# Altium PCB AIMLAB_TESTSTATION_ADC_V1.PcbDoc (part 3 of 4)
Units mm, origin at the board's own origin, x right, y up, seen from the top; angles counter-clockwise.
Board outline 175.7 x 83.5 mm, 6 copper layers (Top Layer, MidLayer1, MidLayer2, MidLayer3, MidLayer4, Bottom Layer), stack 1.507 mm thick; 326 components, 348 nets, 1330 pads, 153 vias.
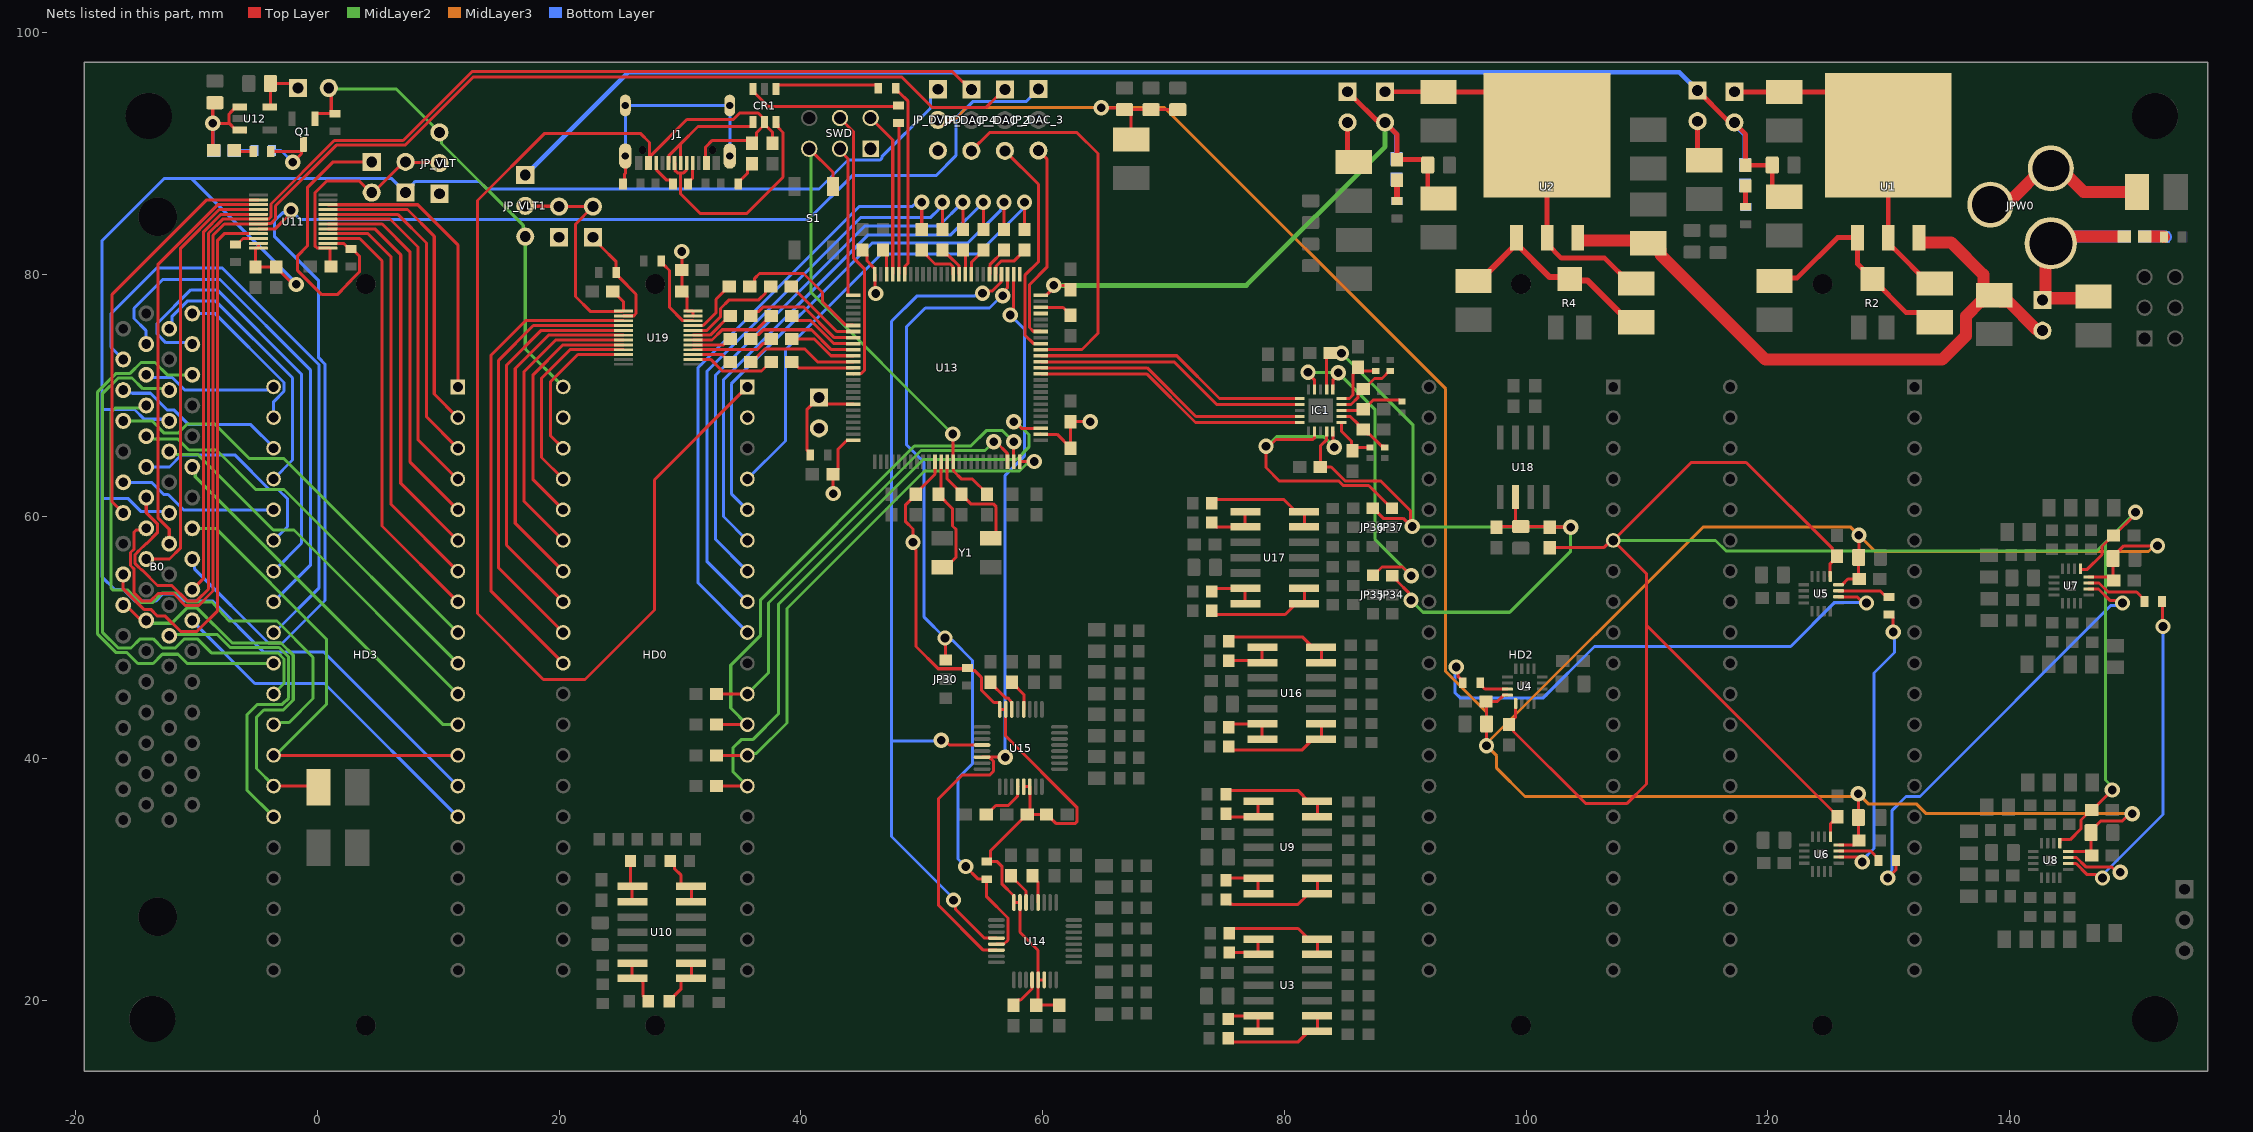
[diagram p7: the nets of this part, all layers, seen from the top]

## Via types
v1: diameter 1.27, hole 0.711, Top Layer to Bottom Layer, 153 vias

## Nets (pads, with @x,y where several pads share a name; then routed paths per layer and width w, separated by ;. In a path a pad name is that pad's centre, name@x,y a point inside that pad or via, vN(x,y) a via of type N, cw(c..) or ccw(c..) an arc to the next point about the centre after c; other vN are vias at no path point) (continued)
DAQ_AO0: B0.22 HD3.30 | length 27.5
  MidLayer2 w0.254: B0.22@-12.247,50.135 -12.124,50.258 -8.297,50.258 -7.199,49.16 -3.156,49.16 -2.374,48.379 -2.374,44.976 -2.889,44.461 -4.954,44.461 -5.825,43.59 -5.825,37.375 HD3.30@-3.615,35.165
DAQ_AO1: B0.21 HD3.29 | length 28.7
  Bottom Layer w0.254: B0.21@-10.342,51.405 -10.342,51.367 -5.164,46.189 0.601,46.189 HD3.29@11.625,35.165
DAQ_AOGND0: B0.54 B0.55 HD3.28 L5.2 | length 34.2
  Top Layer w0.254: B0.54@-16.057,52.675 -15.85,52.675 -14.784,51.609 -14.356,51.609 B0.55@-14.152,51.405 ; HD3.28@-3.615,37.705 -0.005,37.705 L5.2@0.1,37.6
  MidLayer2 w0.254: B0.55@-14.152,51.405 -13.922,51.175 -12.05,51.175 -10.804,52.421 -9.921,52.421 -7.042,49.541 -2.998,49.541 -1.993,48.537 -1.993,45.186 -1.993,44.818 -2.811,44 -4.425,44 -5.025,43.4 -5.025,39.15 -3.615,37.74 HD3.28@-3.615,37.705
DAQ_DGND0: B0.15 HD3.25 HD3.26 | length 41.7
  Top Layer w0.25: HD3.26@-3.615,40.245 HD3.25@11.625,40.245
  MidLayer2 w0.25: B0.15@-10.342,59.025 -8.4,59.025 0.75,49.875 0.75,44.45 -3.455,40.245 HD3.26@-3.615,40.245
DAQ_DIO0: B0.52 U11.21 | length 45.4
  Top Layer w0.254: B0.52@-16.057,55.215 -16.057,54.024 -14.353,52.319 -13.773,52.319 -13.214,51.761 -12.579,51.761 -11.309,50.491 -9.963,50.491 -8.242,52.212 -8.242,82.858 -7.7,83.4 U11.21@-4.87,83.4
DAQ_DIO0T: HD3.15 U11.3 | length 36.1
  Top Layer w0.25: U11.3@0.87,83 3.5,83 5.35,81.15 5.35,59.22 HD3.15@11.625,52.945
DAQ_DIO1: B0.17 JP_DAC_3.1 U11.20 | length 122.4
  Top Layer w0.254: U11.20@-4.87,83.8 -3.482,83.8 -2.175,85.107 v1(-2.175,85.325)
  Bottom Layer w0.254: B0.17@-10.342,56.485 -10.147,56.29 -10.147,55.647 -4.041,49.541 -2.884,49.541 0.632,53.057 0.632,72.604 0.111,73.125 0.111,79.514 -3.55,83.175 -3.55,84.45 -2.869,85.131 -2.369,85.131 v1(-2.175,85.325) -1.436,84.586 40.636,84.586 44.25,88.2 51.175,88.2 52.825,89.85 52.825,92.935 54.215,94.325 58.62,94.325 JP_DAC_3.1@59.65,95.355
DAQ_DIO1T: HD3.13 U11.4 | length 34.3
  Top Layer w0.254: U11.4@0.87,83.4 4.2,83.4 6.1,81.5 6.1,61.01 HD3.13@11.625,55.485
DAQ_DIO2: B0.49 JP_DAC_2.1 U11.19 | length 117
  Top Layer w0.25: B0.49@-14.152,59.025 -14.29,58.887 -14.979,58.887 -15.145,58.721 -15.145,57.322 -15.445,57.021 -15.445,55.949 -15.145,55.648 -15.145,53.647 -14.53,53.033 -13.774,53.033 -13.182,53.625 -11.9,53.625 -10.9,52.625 -9.833,52.625 -8.621,53.837 -8.621,83.266 -7.687,84.2 U11.19@-4.87,84.2 -4.865,84.205 -4.147,84.205 -4.124,84.228 -3.859,84.228 -3.452,84.635 -3.452,85.698 1.571,90.721 7.257,90.721 12.911,96.375 48.325,96.375 50.85,93.85 55.325,93.85 56.18,94.705 56.25,94.705 JP_DAC_2.1@56.875,95.33
DAQ_DIO2T: HD3.11 U11.5 | length 32.5
  Top Layer w0.254: U11.5@0.87,83.8 4.75,83.8 6.9,81.65 6.9,62.75 HD3.11@11.625,58.025
DAQ_DIO3: B0.47 JP_DAC_4.1 U11.18 | length 113.7
  Top Layer w0.254: B0.47@-14.152,61.565 -14.152,60.318 -13.238,59.404 -13.238,58.646 -14.129,57.755 -14.175,57.755 -14.746,57.184 -14.766,57.165 -15.066,56.864 -15.066,56.106 -14.766,55.805 -14.746,55.786 -14.531,55.571 -14.484,55.571 -13.214,54.301 -12.04,54.301 -10.77,53.031 -9.963,53.031 -9,53.994 -9,83.423 -7.823,84.6 U11.18@-4.87,84.6 -4.863,84.607 -4.145,84.607 -4.126,84.626 -3.997,84.626 -3.831,84.792 -3.831,85.855 1.414,91.1 7.1,91.1 12.819,96.819 52.531,96.819 53.397,95.953 53.477,95.953 JP_DAC_4.1@54.1,95.33
DAQ_DIO3T: HD3.9 U11.6 | length 30.7
  Top Layer w0.254: U11.6@0.87,84.2 5.361,84.2 7.65,81.911 7.65,64.54 HD3.9@11.625,60.565
DAQ_DIO4: B0.19 U11.17 | length 35.1
  Top Layer w0.254: B0.19@-10.342,53.945 -9.4,54.887 -9.4,83.562 -7.962,85 U11.17@-4.87,85
DAQ_DIO4T: HD3.7 U11.7 | length 28.4
  Top Layer w0.254: U11.7@1.5,84.619 6.006,84.619 8.325,82.3 8.325,66.35 11.57,63.105 HD3.7@11.625,63.105
DAQ_DIO5: B0.51 U11.16 | length 35.8
  Top Layer w0.254: B0.51@-14.152,56.485 -12.224,56.485 -11.3,57.409 -11.3,82.201 -8.108,85.393 -4.877,85.393 U11.16@-4.87,85.4
DAQ_DIO5T: HD3.5 U11.8 | length 27.2
  Top Layer w0.254: U11.8@0.87,85 6.65,85 9.025,82.625 9.025,68.245 HD3.5@11.625,65.645
DAQ_DIO6: B0.16 U11.15 | length 33.8
  Top Layer w0.254: B0.16@-12.247,57.755 -12.247,58.952 -13.161,59.866 -13.161,80.878 -8.24,85.8 U11.15@-4.87,85.8
DAQ_DIO6T: HD3.3 U11.9 | length 25.5
  Top Layer w0.254: U11.9@0.87,85.4 0.877,85.393 7.457,85.393 9.675,83.175 9.675,70.135 HD3.3@11.625,68.185
DAQ_DIO7: B0.48 U11.14 | length 33.8
  Top Layer w0.254: B0.48@-16.057,60.295 -16.971,61.209 -16.971,78.379 -9.15,86.2 U11.14@-4.87,86.2
DAQ_DIO7T: HD3.1 U11.10 | length 23.9
  Top Layer w0.254: U11.10@0.87,85.8 0.877,85.793 8.307,85.793 11.625,82.475 HD3.1@11.625,70.725
DAQ_DVDD5: B0.8 B0.14 C50.2 C51.2 HD3.27 JP4.1 JP_DVDD.1 U11.23 U11.24 | length 172
  Top Layer w0.254: U11.23@-4.87,82.6 U11.24@-4.87,82.2 -5.093,82.2 -5.1,82.193 C51.2@-5.1,80.65 C50.2@-3.4,80.65 -3.4,80.6 -2,79.2 v1(-1.75,79.2)
  Bottom Layer w0.254: B0.14@-12.247,60.295 -12.352,60.4 -14.575,60.4 -15.683,61.508 -17.825,61.508 ; B0.8@-12.247,67.915 -12.382,68.05 -14.31,68.05 -15.12,68.859 -17.825,68.859 ; v1(-1.75,79.2) -1.75,79.305 -10.423,87.978 ; HD3.27@11.625,37.705 0.551,48.779 -4.422,48.779 -8.673,53.031 -11.015,53.031 -11.574,53.589 -12.773,53.589 -13.332,53.031 -15.119,53.031 -16.064,53.975 -16.775,53.975 -17.825,55.025 -17.825,61.508 ; JP_DVDD.1@51.333,95.347 50.71,94.724 50.71,93.76 46.704,89.754 46.704,89.645 46.555,89.496 43.896,89.496 41.5,87.1 14.02,87.1 13.416,87.704 8.072,87.704 7.923,87.555 7.923,87.423 JP4.1@7.3,86.8 6.122,87.978 -10.423,87.978 ; -17.825,61.508 -17.825,68.859 ; -17.825,68.859 -17.825,82.797 -12.644,87.978 -10.423,87.978
DAQ_PFI0: B0.11 HD3.23 | length 31.1
  MidLayer2 w0.25: B0.11@-10.342,64.105 -10.098,63.861 -10.098,63.29 10.406,42.785 HD3.23@11.625,42.785
DAQ_PFI1: B0.10 HD3.21 | length 32.2
  MidLayer2 w0.25: B0.10@-12.247,65.375 -11.902,65.375 -11.646,65.119 -9.869,65.119 -3.637,58.887 -1.937,58.887 HD3.21@11.625,45.325
DAQ_PFI2: B0.43 HD3.19 | length 33.6
  MidLayer2 w0.25: B0.43@-14.152,66.645 -13.908,66.401 -13.37,66.401 -13.369,66.4 -11.531,66.4 -10.627,65.496 -8.346,65.496 -5.093,62.243 -2.753,62.243 HD3.19@11.625,47.865
DAQ_PFI3: B0.42 HD3.17 | length 35.6
  MidLayer2 w0.25: B0.42@-16.057,67.915 -13.681,67.915 -12.667,66.901 -11.52,66.901 -10.762,67.659 -8.48,67.659 -5.605,64.783 -2.753,64.783 HD3.17@11.625,50.405
DAQ_PFI4: B0.41 HD3.24 | length 45.1
  MidLayer2 w0.25: B0.41@-14.152,69.185 -14.362,68.975 -16.725,68.975 -17.071,68.629 -17.071,54.175 -17.071,54.071 -16.925,53.925 -15.675,53.925 -14.621,52.871 -13.633,52.871 -12.815,53.689 -11.52,53.689 -10.762,52.931 -8.718,52.931 -8.552,52.765 -7.307,51.35 -3.342,51.35 -0.35,48.358 -0.35,44.95 -2.33,42.97 -3.43,42.97 HD3.24@-3.615,42.785
DAQ_PFI5: B0.6 HD3.22 | length 46.7
  MidLayer2 w0.25: B0.6@-12.247,70.455 -12.368,70.576 -14.437,70.576 -15.33,71.469 -16.477,71.469 -17.75,70.196 -17.75,50.394 -16.477,49.121 -15.407,49.121 -14.649,49.879 -13.579,49.879 -12.821,49.121 -11.75,49.121 -10.992,49.879 -9.922,49.879 -8.766,48.723 -3.975,48.723 -3.972,48.727 -3.258,48.727 -2.753,48.222 -2.753,46.187 HD3.22@-3.615,45.325
DAQ_PFI6: B0.5 HD3.20 | length 45.5
  MidLayer2 w0.25: B0.5@-10.342,71.725 -12.411,71.725 -13.425,72.739 -14.583,72.739 -15.476,71.846 -16.633,71.846 -18.2,70.279 -18.2,50.311 -16.633,48.744 -15.744,48.744 -14.851,47.851 -13.579,47.851 -12.821,48.609 -11.52,48.609 -10.762,47.851 -3.629,47.851 HD3.20@-3.615,47.865
DAQ_PFI7: B0.38 HD3.18 | length 50
  Bottom Layer w0.25: B0.38@-16.057,72.995 -17.071,74.009 -17.071,76.779 -13.3,80.55 -7.85,80.55 0.125,72.575 0.125,54.075 -3.545,50.405 HD3.18@-3.615,50.405
DAQ_PFI8: B0.37 HD3.16 | length 42.5
  Bottom Layer w0.25: B0.37@-14.152,74.265 -14.183,74.296 -14.183,75.402 -15.166,76.385 -15.166,77.225 -12.791,79.6 -8.05,79.6 -0.55,72.1 -0.55,56.01 HD3.16@-3.615,52.945
DAQ_PFI9: B0.3 HD3.14 | length 37.4
  Bottom Layer w0.25: B0.3@-10.342,74.265 -10.463,74.386 -12.532,74.386 -13.261,75.115 -13.261,75.955 -10.466,78.75 -8.275,78.75 -1.3,71.775 -1.3,57.8 HD3.14@-3.615,55.485
DAQ_PFI10: B0.45 HD3.12 | length 17.5
  Bottom Layer w0.25: B0.45@-14.152,64.105 -12.227,64.105 -11.232,65.1 -6.829,65.1 -3.972,62.243 -3.243,62.243 -2.475,61.475 -2.475,59.165 HD3.12@-3.615,58.025
DAQ_PFI11: B0.46 HD3.10 | length 13.4
  Bottom Layer w0.25: B0.46@-16.057,62.835 -13.718,62.835 -12.704,61.821 -12.339,61.821 -11.069,60.551 -3.629,60.551 HD3.10@-3.615,60.565
DAQ_PFI12: B0.2 HD3.8 | length 23.3
  Bottom Layer w0.25: B0.2@-12.247,75.535 -12.003,75.779 -12.003,76.578 -10.762,77.819 -8.394,77.819 -2.05,71.475 -2.05,64.67 HD3.8@-3.615,63.105
DAQ_PFI13: B0.40 HD3.6 | length 14.5
  Bottom Layer w0.25: B0.40@-16.057,70.455 -15.813,70.211 -15.286,70.211 -15.274,70.199 -13.799,70.199 -12.427,68.827 -11.869,68.827 -10.642,67.6 -5.5,67.6 -3.615,65.715 HD3.6@-3.615,65.645
DAQ_PFI14: B0.1 HD3.4 | length 13.2
  Bottom Layer w0.25: B0.1@-10.342,76.805 -8.477,76.805 -2.753,71.082 -2.753,70.368 -3.615,69.506 HD3.4@-3.615,68.185
DAQ_PFI15: B0.39 HD3.2 | length 11.2
  Bottom Layer w0.25: B0.39@-14.152,71.725 -13.927,71.5 -12,71.5 -10.95,70.45 -4.152,70.45 -3.877,70.725 HD3.2@-3.615,70.725
DVDD: C11.1 C12.1 C13.1 C14.1 C24.2 C25.2 C28.2 C29.2 C36.2 C37.2 C40.2 C41.2 C46.2 C47.2 HD0.3 JP_DVDD.2 U4.16 U5.16 U6.16 U7.16 U8.16 | length 245.5
  Top Layer w0.25: v1(64.85,93.825) 64.875,93.8 66.63,93.8 C12.1@66.775,93.655 ; C11.1@67.325,91.2 67.325,93.241 66.911,93.655 C13.1@68.975,93.655 C14.1@71.175,93.655 ; C25.2@96.675,44.7 97.615,44.7 98.14,45.225 U4.16@98.45,45.225 ; v1@96.72,40.97 C24.2@96.72,42.925 ; C24.2@96.72,43.079 C25.2@96.72,44.7 ; U5.16@125.835,54.36 126.145,54.36 126.61,54.825 C29.2@127.55,54.825 127.505,54.87 C28.2@127.505,56.625 127.525,56.645 v1(127.525,58.45) ; U6.16@125.87,32.825 127.15,32.825 C37.2@127.525,33.2 127.48,33.245 C36.2@127.48,35.1 v1(127.48,37.055) ; U8.16@144.825,32.3 146.425,32.3 C47.2@146.775,31.95 146.73,31.995 C46.2@146.73,33.85 146.73,34.02 147.522,34.812 149.31,34.812 149.923,35.425 v1(150.125,35.425) ; U7.16@146.535,55.01 148.29,55.01 C41.2@148.6,54.7 148.555,54.745 148.555,56.695 149.435,57.575 v1(152.225,57.575)
  MidLayer3 w0.25: JP_DVDD.2@51.333,92.807 52.7,92.807 53.71,93.817 70.086,93.817 93.338,70.565 93.338,47.183 96.72,43.801 v1@96.72,41.22 ; v1(150.125,35.425) 133.083,35.425 132.268,36.24 128.295,36.24 v1(127.48,37.055) 127.204,37.055 126.992,36.843 99.902,36.843 97.561,39.184 97.561,40.204 v1(96.72,41.045) v1@96.72,41.22 ; v1(152.225,57.575) 151.949,57.575 151.474,57.1 128.875,57.1 v1(127.525,58.45) 126.85,59.125 114.625,59.125 v1@96.72,41.22
DVDD1.8: HD0.2 JP5.2 JP_VLT1.3 JP_VLT.3 Q1.1 R10.2 | length 40.4
  Top Layer w0.254: Q1.1@-0.2,92.91 -0.2,93.152 -0.027,93.325 R10.2@1.475,93.325 1.35,93.325 1.152,93.523 1.152,95.248 JP5.2@0.95,95.45
  MidLayer2 w0.254: JP5.2@0.95,95.45 1.025,95.375 6.505,95.375 JP_VLT.3@10.1,91.78 10.268,91.612 10.268,90.857 17.037,84.088 17.037,83.323 JP_VLT1.3@17.2,83.16 17.2,73.86 HD0.2@20.335,70.725
DVDD_3V: C9.1 C10.2 C32.2 C33.2 C42.2 C43.2 C53.2 C93.2 C96.2 C97.2 C98.2 C99.2 C100.2 C117.2 C118.2 HD0.4 JP2.2 JP19.1 JP28.2 JP32.1 JP_DVDD.3 JP_VLT.1 LED3.2 LED4.2 LED8.2 LED9.2 R27.2 R28.2 SWD.1 U12.1 U12.3 U13.11 U13.27 U13.50 U13.75 U13.100 U14.15 U14.16 U14.29 U14.30 U15.15 U15.16 U15.29 U15.30 U19.23 U19.24 | length 156.7
  Top Layer w0.25: v1(-8.65,92.525) -8.65,90.375 LED4.2@-8.575,90.3 ; -7.287,92.761 -7.287,92.522 -6.74,91.975 U12.3@-6.43,91.975 ; -7.128,93.487 U12.1@-6.74,93.875 ; C100.2@42.65,63.5 42.675,63.475 v1(42.675,61.9) ; C100.2@42.7,63.5 43.075,63.875 43.075,65.575 43.773,66.273 44.323,66.273 U13.100@44.35,66.3 ; C96.2@49.5,61.85 49.5,61.8 48.675,60.975 48.675,59.569 49.275,58.969 v1(49.275,57.875) 49.47,57.68 49.47,57.273 49.525,57.219 49.525,49.244 51.361,47.408 53.708,47.408 R28.2@53.775,47.475 ; C96.2@49.5,61.9 51.1,63.5 U13.11@51.1,64.55 ; R28.2@53.875,47.475 54.075,47.275 54.35,47.275 54.923,46.702 54.923,45.646 55.959,44.61 56.419,44.61 56.442,44.586 U15.16@56.442,44.05 U15.15@56.942,44.05 56.942,41.84 62.827,35.954 62.827,34.746 62.679,34.598 61.127,34.598 60.375,35.35 C43.2@60.325,35.35 C42.2@58.725,35.35 ; R27.2@55.375,31.45 R27.2@55.5,31.45 ; U15.29@58.442,37.65 U15.30@58.942,37.65 58.942,35.567 C42.2@58.725,35.35 ; U13.27@59.823,66.827 U13.27@59.85,66.8 61.2,66.8 C93.2@62.3,65.7 ; U13.50@59.85,78.3 60.294,78.3 60.925,78.931 v1(60.925,79.125) 61.925,79.125 C99.2@62.3,78.75 ; U14.30@60.125,21.675 U14.29@59.625,21.675 ; C33.2@61.375,19.575 C32.2@59.475,19.575 59.625,19.725 U14.29@59.625,21.675 ; C93.2@62.3,65.65 C98.2@62.3,67.85 v1(63.925,67.85) ; R27.2@55.5,31.45 55.7,31.65 55.7,32.375 58.675,35.35 C42.2@58.725,35.35 ; R27.2@55.5,31.45 56.25,31.45 56.623,31.077 56.623,29.621 57.625,28.619 U14.16@57.625,28.075 U14.15@58.125,28.075 58.125,25.62 59.625,24.12 U14.29@59.625,21.675
  Top Layer w0.254: C53.2@-8.475,94.23 -8.65,94.055 v1(-8.65,92.525) -7.287,92.525 ; -7.289,92.761 -7.289,93.299 -7.114,93.474 -7.114,93.501 -6.74,93.875 U12.1@-6.43,93.875 ; U12.3@-6.43,91.975 -6.12,91.975 U12.3@-5.952,91.807 ; v1(30.15,81.925) C118.2@30.15,80.4 C117.2@30.15,78.6 30.2,78.6 30.573,78.227 30.573,77.007 30.58,77 U19.24@31.07,77 31.07,76.607 31.077,76.6 31.1,76.6 U19.23@31.07,76.6 ; C97.2@45.1,82.05 45.473,81.677 45.473,81.152 46.075,80.55 46.075,80.075 46.125,80.025 46.125,78.525 v1(46.2,78.45)
  Top Layer w0.4: JP19.1@85.244,95.14 85.244,95.121 85.775,94.59 85.794,94.59 87.574,92.81 88.115,92.81 89.3,91.625 LED3.2@89.3,89.525 91.515,89.525 91.855,89.185 C10.2@91.855,89.075 91.855,87.1 92.655,86.3 C9.1@92.75,86.3
  MidLayer2 w0.4: v1(60.925,79.125) 76.85,79.125 88.325,90.6 JP2.2@88.325,92.6
  Bottom Layer w0.25: v1(-8.65,92.525) -8.65,90.3 LED9.2@-8.575,90.225
  Bottom Layer w0.4: JP2.2@88.325,92.6 88.325,92.591 89.275,91.641 LED8.2@89.275,89.6
DVDD_5V: C7.1 C8.1 JP1.2 JP31.1 JP_VLT1.1 LED2.2 LED7.2 | length 118.4
  Top Layer w0.4: JP31.1@114.175,95.24 116.605,92.81 117.015,92.81 JP1.2@117.225,92.6 117.225,92.541 118.15,91.616 LED2.2@118.15,89.05 118.162,89.062 120.342,89.062 C8.1@120.355,89.075 120.355,87.25 121.155,86.45 C7.1@121.35,86.45
  Bottom Layer w0.4: JP_VLT1.1@17.2,88.24 25.706,96.746 112.669,96.746 JP31.1@114.175,95.24 ; JP1.2@117.225,92.6 117.225,92.441 118.1,91.566 LED7.2@118.1,89.1
MCU_ADC1: HD0.21 R92.1 U13.23 | length 37.1
  Top Layer w0.25: R92.1@33.025,45.325 HD0.21@35.575,45.325 ; v1@55.95,66.125 56.175,66.125 57.073,65.227 57.073,64.577 U13.23@57.1,64.55
  MidLayer2 w0.25: HD0.21@35.575,45.325 37.325,47.075 37.325,52.85 49.929,65.454 55.229,65.454 v1(55.95,66.175)
MCU_ADC2: HD0.23 R93.1 U13.24 | length 43.2
  Top Layer w0.25: R93.1@33.025,42.785 HD0.23@35.575,42.785 ; U13.24@57.6,64.55 v1(57.6,66.175)
  MidLayer2 w0.25: HD0.23@35.575,42.785 34.2,44.16 34.2,47.708 36.675,50.183 36.675,53.125 49.381,65.831 54.056,65.831 55.325,67.1 56.675,67.1 v1(57.6,66.175)
MCU_ADC3: HD0.25 R94.1 U13.25 | length 43.1
  Top Layer w0.25: R94.1@33.025,40.245 HD0.25@35.575,40.245 ; U13.25@58.1,64.55 v1(59.3,64.55)
  MidLayer2 w0.25: HD0.25@35.575,40.245 35.724,40.394 36.319,40.394 38.85,42.925 38.85,52.4 50.225,63.775 58.094,63.775 58.673,64.355 59.105,64.355 v1(59.3,64.55)
MCU_ADC4: HD0.27 R95.1 U13.28 | length 51.5
  Top Layer w0.25: R95.1@33.025,37.705 HD0.27@35.575,37.705 ; v1(57.6,67.85) 57.706,67.85 58.256,67.3 U13.28@59.85,67.3
  MidLayer2 w0.25: HD0.27@35.575,37.705 34.375,38.905 34.375,40.85 35.1,41.575 36.05,41.575 38.15,43.675 38.15,52.75 50.125,64.725 57.85,64.725 58.859,65.734 58.859,66.791 57.8,67.85 v1(57.6,67.85)
MCU_DAC_CLRn: U13.47
MCU_DAC_CSn: JP_DAC_4.3 U13.41 | length 32
  Top Layer w0.254: JP_DAC_4.3@54.1,90.25 55.625,91.775 62.825,91.775 64.575,90.025 64.575,75.15 63.25,73.825 59.875,73.825 U13.41@59.85,73.8
MCU_DAC_SCK: JP_DAC_2.3 U13.42 | length 18.5
  Top Layer w0.254: JP_DAC_2.3@56.875,90.25 59.65,87.475 59.65,81.075 58.525,79.95 58.525,75.016 59.216,74.325 59.825,74.325 U13.42@59.85,74.3
MCU_DAC_SDI: JP_DAC_3.3 U13.44 | length 16.6
  Top Layer w0.254: JP_DAC_3.3@59.65,90.275 60.375,89.55 60.375,80.65 58.906,79.181 58.906,75.635 59.216,75.325 59.825,75.325 U13.44@59.85,75.3
MCU_DIO0: R70.1 U19.21 | length 5
  Top Layer w0.25: U19.21@31.07,75.8 31.075,75.805 31.919,75.805 32.971,76.857 32.971,77.971 34.025,79.025 R70.1@34.075,79.025
MCU_DIO0t: HD0.20 U19.3 | length 40.1
  Top Layer w0.254: HD0.20@20.335,47.865 14.35,53.85 14.35,73.325 17.225,76.2 U19.3@25.33,76.2
MCU_DIO1: R71.1 U19.20 | length 8.4
  Top Layer w0.25: U19.20@31.07,75.4 32.23,75.4 33.348,76.518 33.348,77.204 34.071,77.927 36.527,77.927 37.075,78.475 37.075,78.65 37.45,79.025 R71.1@37.5,79.025
MCU_DIO1t: HD0.18 U19.4 | length 36.3
  Top Layer w0.254: HD0.18@20.335,50.405 15,55.74 15,72.925 17.875,75.8 U19.4@25.33,75.8
MCU_DIO2: R72.1 U19.19 | length 3.7
  Top Layer w0.25: U19.19@31.07,75 32.5,75 34.1,76.6 R72.1@34.15,76.6
MCU_DIO2t: HD0.16 U19.5 | length 32.4
  Top Layer w0.254: HD0.16@20.335,52.945 15.65,57.63 15.65,72.525 18.525,75.4 U19.5@25.33,75.4
MCU_DIO3: R73.1 U19.18 | length 7.3
  Top Layer w0.25: U19.18@31.07,74.6 32.644,74.6 33.496,75.452 36.352,75.452 37.5,76.6 R73.1@37.55,76.6
MCU_DIO3t: HD0.14 U19.6 | length 28.5
  Top Layer w0.254: HD0.14@20.335,55.485 16.375,59.445 16.375,72.25 19.125,75 U19.6@25.33,75
MCU_DIO4: R74.1 U19.17 | length 3.3
  Top Layer w0.25: U19.17@31.07,74.2 33.6,74.2 34.1,74.7 R74.1@34.15,74.7
MCU_DIO4t: HD0.12 U19.7 | length 24.6
  Top Layer w0.254: HD0.12@20.335,58.025 17.1,61.26 17.1,71.975 19.725,74.6 U19.7@25.33,74.6
MCU_DIO5: R75.1 U19.16 | length 6.9
  Top Layer w0.25: U19.16@31.07,73.8 36.367,73.8 36.892,74.325 37.125,74.325 37.5,74.7 R75.1@37.55,74.7
MCU_DIO5t: HD0.10 U19.8 | length 20.7
  Top Layer w0.254: HD0.10@20.335,60.565 17.825,63.075 17.825,71.7 20.325,74.2 U19.8@25.33,74.2
MCU_DIO6: R76.1 U19.15 | length 3.3
  Top Layer w0.25: U19.15@31.07,73.4 33.5,73.4 34.1,72.8 R76.1@34.15,72.8
MCU_DIO6t: HD0.8 U19.9 | length 16.8
  Top Layer w0.254: HD0.8@20.335,63.105 18.55,64.89 18.55,71.45 20.9,73.8 U19.9@25.33,73.8
MCU_DIO7: R77.1 U19.14 | length 7.2
  Top Layer w0.25: U19.14@31.07,73 32.544,73 33.496,72.048 36.748,72.048 37.5,72.8 R77.1@37.55,72.8
MCU_DIO7t: HD0.6 U19.10 | length 12.9
  Top Layer w0.254: HD0.6@20.335,65.645 19.275,66.705 19.275,71.125 21.55,73.4 U19.10@25.33,73.4
MCU_DIO8: HD0.7 R78.1 | length 39.2
  Top Layer w0.25: R78.1@58.5,83.75 v1@58.5,85.85
  Bottom Layer w0.25: HD0.7@35.575,63.105 38.725,66.255 38.725,73.8 46.65,81.725 54.625,81.725 58.305,85.405 58.305,85.805 v1(58.5,86)
MCU_DIO9: HD0.9 R79.1 | length 42.1
  Top Layer w0.25: R79.1@56.8,83.75 v1@56.8,85.85
  Bottom Layer w0.25: HD0.9@35.575,60.565 34.25,61.89 34.25,70.976 45.899,82.625 53.8,82.625 56.523,85.348 56.523,85.447 56.8,85.724 v1(56.8,86)
MCU_DIO12/PWM: HD0.11 R81.1 | length 43.8
  Top Layer w0.25: R81.1@55.1,83.75 v1@55.1,85.9
  Bottom Layer w0.25: HD0.11@35.575,58.025 33.6,60 33.6,71.325 45.575,83.3 52.4,83.3 v1(55.1,86)
MCU_DIO13/PWM: HD0.13 R82.1 | length 45.9
  Top Layer w0.25: R82.1@53.4,83.75 v1@53.4,85.975
  Bottom Layer w0.25: HD0.13@35.575,55.485 32.925,58.135 32.925,71.675 45.275,84.025 51.425,84.025 v1(53.4,86)
MCU_DIO14/PWM: HD0.15 R83.1 | length 48.2
  Top Layer w0.25: R83.1@51.7,83.75 v1@51.7,86.05
  Bottom Layer w0.25: HD0.15@35.575,52.945 32.225,56.295 32.225,72 44.975,84.75 50.75,84.75 51.386,85.386 51.386,85.41 51.7,85.724 v1(51.7,86)
MCU_DIO15/PWM: HD0.17 R84.1 | length 50
  Top Layer w0.25: R84.1@50,83.75 v1@50,86.025
  Bottom Layer w0.25: HD0.17@35.575,50.405 35.575,50.43 31.5,54.505 31.5,72.325 44.821,85.646 49.223,85.646 49.382,85.805 49.805,85.805 v1(50,86)
NetC0_1: C0.1 JP0.1 JPW0.1 LED1.2 LED6.2 | length 21.9
  Top Layer w1: C0.1@146.925,78.2 146.783,78.057 142.842,78.057 JP0.1@142.7,77.915 142.95,78.165 142.95,82.15 143.95,83.15 LED1.2@149.425,83.15
  Bottom Layer w1: JPW0.1@143.4,82.6 143.975,83.175 LED6.2@149.475,83.175
NetC2_1: C2.1 R1.1 R2.2 U1.1 | length 18.9
  Top Layer w0.4: C2.1@120.55,79.475 120.816,79.741 122.416,79.741 125.75,83.075 U1.1@127.41,83.075 127.41,80.89 R2.2@128.65,79.65 131.425,76.875 133,76.875 R1.1@133.8,76.075
NetC3_1: C3.1 JP1.1 R1.2 U1.2 U1.4 | length 28.4
  Top Layer w0.4: JP1.1@117.225,95.14 117.24,95.125 C3.1@121.35,95.125 126.35,95.125 U1.4@129.95,91.525 U1.2@129.95,83.075 129.95,82.55 130.275,82.225 130.35,82.225 133.3,79.275 R1.2@133.8,79.275
NetC5_1: C5.1 R3.1 R4.2 U2.1 | length 17.9
  Top Layer w0.5: C5.1@95.65,79.6 96.275,79.6 96.9,80.225 96.9,80.255 U2.1@99.195,82.55 ; U2.1@99.195,83.075 U2.1@99.195,82.55 ; R3.1@109.1,76.075 108.35,76.825 107.775,76.825 105.057,79.543 103.707,79.543 103.425,79.825 101.92,79.825 U2.1@99.195,82.55
NetC6_1: C6.1 JP2.1 R3.2 U2.2 U2.4 | length 32.6
  Top Layer w0.4: JP2.1@88.325,95.14 92.735,95.14 C6.1@92.75,95.125 98.135,95.125 U2.4@101.735,91.525 U2.2@101.735,83.075 101.735,82.55 102.91,81.375 106.5,81.375 108.6,79.275 R3.2@109.1,79.275
NetC22_1: C22.1 U14.12 | length 2.4
  Top Layer w0.25: C22.1@59.175,30.275 59.175,30.225 59.625,29.775 U14.12@59.625,28.075
NetC23_1: C23.1 U15.12 | length 2.7
  Top Layer w0.25: C23.1@57.475,46.3 57.475,46.25 58.442,45.283 U15.12@58.442,44.05
NetC52_2: C52.2 JP4.2 JP9.2 JP_VLT.2 U11.1 | length 19.4
  Top Layer w0.254: C52.2@1.05,80.7 1.05,82.193 1.043,82.2 U11.1@0.87,82.2 0.4,82.2 0.393,82.207 -0.026,82.207 -0.175,82.356 -0.175,86.802 0.773,87.75 3.475,87.75 4.425,86.8 4.63,86.8 7.17,89.34 JP4.2@7.3,89.34 7.35,89.29 10.05,89.29 JP_VLT.2@10.1,89.24
NetC54_2: C54.2 JP5.1 U12.5 | length 4.4
  Top Layer w0.254: U12.5@-3.92,93.875 -3.88,93.915 C54.2@-3.88,95.825 -1.965,95.825 JP5.1@-1.59,95.45
NetC61_2: C61.2 U14.14 | length 2.7
  Top Layer w0.25: C61.2@57.375,30.275 57.375,30.225 57.75,29.85 57.8,29.85 58.625,29.025 U14.14@58.625,28.075
NetC62_2: C62.2 U15.14 | length 3.1
  Top Layer w0.25: C62.2@55.675,46.3 55.675,46.25 56.923,45.002 57.108,45.002 57.344,44.767 57.344,44.712 57.442,44.614 U15.14@57.442,44.05
NetC63_2: C63.2 U14.28 | length 2.9
  Top Layer w0.25: C63.2@57.575,19.575 57.575,19.625 57.95,20 58.183,20 59.115,20.932 59.115,21.665 U14.28@59.125,21.675
NetC64_2: C64.2 U15.28 | length 4
  Top Layer w0.25: C64.2@55.325,35.35 55.375,35.35 56.127,36.102 57.16,36.102 57.932,36.874 57.932,37.64 U15.28@57.942,37.65
NetC94_1: C94.1 U13.48 | length 2.7
  Top Layer w0.25: U13.48@59.85,77.3 61.7,77.3 62.3,76.7 C94.1@62.3,76.65
NetC95_1: C95.1 U13.73 | length 2.1
  Top Layer w0.254: C95.1@46.8,82.05 47.1,81.75 U13.73@47.1,80.05
NetC119_2: C119.2 JP32.2 JP33.2 JP_VLT1.2 U19.1 | length 20
  Top Layer w0.25: JP32.2@20,85.64 JP33.2@22.8,85.64 21.35,84.19 21.35,78.2 22.578,76.972 U19.1@25.2,76.972
  Top Layer w0.254: JP_VLT1.2@17.2,85.7 17.23,85.67 JP32.2@19.97,85.67 ; C119.2@24.45,78.6 24.5,78.6 25.33,77.77 U19.1@25.33,77
NetCR1_1: CR1.1 R97.2 | length 8.9
  Top Layer w0.25: CR1.1@37.95,95.365 37.95,95.558 38.104,95.712 46.2,95.712 46.4,95.512 R97.2@46.4,95.425
NetCR1_3: CR1.3 R98.2 | length 12.8
  Top Layer w0.25: CR1.3@36.05,95.365 36.05,95.156 37.268,93.938 48.013,93.938 R98.2@48.075,94
NetJ1_A5: J1.A5 R62.2 | length 1.9
  Top Layer w0.25: R62.2@30.675,87.5 30.675,87.625 31.05,88 J1.A5@31.05,89.25
NetJ1_B5: J1.B5 R64.1 | length 2.5
  Top Layer w0.25: J1.B5@28.05,89.25 28.075,89.225 28.075,88.649 28.899,87.825 29.225,87.825 29.425,87.625 R64.1@29.425,87.5
NetJ1_SH1: J1.SH1 J1.SH2 J1.SH3 J1.SH4 R65.2 | length 19.4
  Top Layer w0.25: R65.2@25.275,87.5 25.427,87.652 25.427,88.325 25.48,88.378 J1.SH2@25.48,89.82
  Bottom Layer w0.25: J1.SH2@25.48,89.82 J1.SH4@25.48,94 J1.SH3@34.12,94 J1.SH1@34.12,89.82
NetJP9_1: JP9.1 R7.1 U11.2 | length 24.5
  Top Layer w0.25: U11.2@0.87,82.6 2.175,82.6 2.65,82.125 R7.1@2.775,82.125 2.9,82.125 3.477,81.548 3.477,80.23 3.243,79.996 ccw(c4.005,79.234) 3.229,79.982 1.657,78.35 0.369,78.35 -1.625,80.344 -1.625,81.575 -0.825,82.375 -0.825,87.2 1.315,89.34 JP9.1@4.5,89.34
NetJP19_2: JP19.2 L2.2 | length 3.5
  Top Layer w0.4: JP19.2@85.225,92.6 85.225,89.825 L2.2@85.725,89.325
NetJP28_1: JP28.1 R45.1 U13.94 | length 8.3
  Top Layer w0.25: R45.1@40.775,65.1 40.775,65.225 40.498,65.502 40.498,68.838 JP28.1@41.5,69.84 42.04,69.3 U13.94@44.35,69.3
NetJP31_2: JP31.2 L3.2 | length 3.5
  Top Layer w0.4: JP31.2@114.175,92.7 114.175,90.025 L3.2@114.725,89.475
NetJP33_1: JP33.1 R80.1 U19.2 | length 8.9
  Top Layer w0.254: JP33.1@22.8,83.1 23.423,82.477 23.423,82.377 24.725,81.075 R80.1@24.725,80.2 24.923,80.002 24.923,79.827 26.369,78.381 26.369,76.792 26.184,76.607 25.337,76.607 U19.2@25.33,76.6
NetJPW0_2: JPW0.2 JPW0.3 L6.1 | length 14.2
  Top Layer w1: JPW0.3@138.4,85.8 138.938,86.338 140.263,86.338 142.725,88.8 144.16,88.8 146.11,86.85 L6.1@150.525,86.85
NetLED1_1: LED1.1 R5.2 | length 1.6
  Top Layer w1: LED1.1@151.175,83.15 152.725,83.15 R5.2@152.75,83.125
NetLED2_1: LED2.1 R6.2 | length 1.7
  Top Layer w0.4: R6.2@118.15,85.625 LED2.1@118.15,87.35
NetLED3_1: LED3.1 R8.2 | length 1.7
  Top Layer w0.5: LED3.1@89.3,87.825 89.312,87.812 89.312,86.113 R8.2@89.325,86.1
NetLED4_1: LED4.1 R9.2 | length 1.6
  Top Layer w0.254: LED4.1@-6.875,90.3 -6.775,90.2 R9.2@-5.3,90.2
NetLED5_1: LED5.1 R63.2 | length 2.1
  Top Layer w0.25: R63.2@34.825,87.5 34.825,87.625 35.575,88.375 35.575,88.8 LED5.1@35.95,89.175
NetLED6_1: LED6.1 R102.2 | length 1.8
  Bottom Layer w1: LED6.1@151.175,83.175 152.883,83.175 R102.2@152.921,83.138
NetLED7_1: LED7.1 R103.2 | length 1.8
  Bottom Layer w0.25: LED7.1@118.1,87.4 118.1,85.675 R103.2@118.175,85.6
NetLED8_1: LED8.1 R104.2 | length 1.8
  Bottom Layer w0.4: LED8.1@89.275,87.9 89.287,87.888 89.287,86.113 R104.2@89.3,86.1
NetLED9_1: LED9.1 R105.2 | length 1.7
  Bottom Layer w0.254: LED9.1@-6.875,90.225 -6.825,90.275 R105.2@-5.2,90.275
NetQ1_3: Q1.3 R9.1 R105.1 | length 7.1
  Top Layer w0.254: R9.1@-3.85,90.2 -1.425,90.2 -1.15,90.475 Q1.3@-1.15,90.79 -1.307,90.633 -1.307,90.018 v1(-2.025,89.3)
  Bottom Layer w0.254: R105.1@-3.75,90.275 -3,90.275 v1(-2.025,89.3)
NetR29_1: R29.1 U3.13 U3.14 | length 9.1
  Top Layer w0.25: R29.1@75.44,25.533 75.44,25.573 75.785,25.918 75.924,25.918 75.931,25.925 81.136,25.925 82.018,25.043 82.73,25.043 U3.13@82.73,23.773
NetR30_2: R30.2 U3.1 U3.2 | length 3.7
  Top Layer w0.25: R30.2@75.44,23.933 76.931,23.933 77.091,23.773 77.802,23.773 U3.1@77.802,25.043
NetR31_2: R31.2 U3.6 U3.7 | length 3.8
  Top Layer w0.25: R31.2@75.34,18.433 75.6,18.693 77.802,18.693 U3.7@77.802,17.423
NetR32_1: R32.1 U3.8 U3.9 | length 9.1
  Top Layer w0.25: R32.1@75.34,16.833 75.623,16.55 81.145,16.55 82.018,17.423 82.73,17.423 U3.9@82.73,18.693
NetR33_1: R33.1 U9.13 U9.14 | length 9.3
  Top Layer w0.25: R33.1@75.171,37.024 75.471,37.324 81.144,37.324 82.034,36.434 82.745,36.434 U9.13@82.745,35.164
NetR34_2: R34.2 U9.1 U9.2 | length 4
  Top Layer w0.25: R34.2@75.171,35.424 75.431,35.164 77.817,35.164 U9.1@77.817,36.434
NetR35_2: R35.2 U9.6 U9.7 | length 4
  Top Layer w0.25: R35.2@75.171,29.924 75.331,30.084 77.817,30.084 U9.7@77.817,28.814
NetR36_1: R36.1 U9.8 U9.9 | length 9.4
  Top Layer w0.25: R36.1@75.171,28.324 75.171,28.284 75.516,27.939 75.649,27.939 75.663,27.925 81.125,27.925 81.86,28.66 82.591,28.66 82.745,28.814 U9.9@82.745,30.084
NetR46_1: R46.1 U16.13 U16.14 | length 9.4
  Top Layer w0.25: R46.1@75.39,49.683 75.732,50.025 81.521,50.025 82.353,49.193 83.064,49.193 U16.13@83.064,47.923
NetR47_2: R47.2 U16.1 U16.2 | length 4.1
  Top Layer w0.25: R47.2@75.39,48.083 77.265,48.083 77.425,47.923 78.136,47.923 U16.1@78.136,49.193
NetR48_2: R48.2 U16.6 U16.7 | length 4.1
  Top Layer w0.25: R48.2@75.39,42.583 75.65,42.843 78.136,42.843 U16.7@78.136,41.573
NetR49_1: R49.1 U16.8 U16.9 | length 9.4
  Top Layer w0.25: R49.1@75.39,40.983 75.673,40.7 81.48,40.7 82.353,41.573 83.064,41.573 U16.9@83.064,42.843
NetR50_1: R50.1 U17.13 U17.14 | length 9.5
  Top Layer w0.25: R50.1@73.99,61.1 74.29,61.4 79.963,61.4 80.953,60.41 81.664,60.41 U17.13@81.664,59.14
NetR51_2: R51.2 U17.1 U17.2 | length 4.2
  Top Layer w0.25: R51.2@73.99,59.5 73.99,59.485 74.335,59.14 76.736,59.14 U17.1@76.736,60.41
NetR52_2: R52.2 U17.6 U17.7 | length 4.1
  Top Layer w0.25: R52.2@73.99,53.8 74.25,54.06 76.736,54.06 U17.7@76.736,52.79
NetR53_1: R53.1 U17.8 U17.9 | length 9.4
  Top Layer w0.25: R53.1@73.99,52.2 74.29,51.9 80.063,51.9 80.953,52.79 81.664,52.79 U17.9@81.664,54.06
NetR66_2: R66.2 U10.1 U10.2 | length 3.4
  Top Layer w0.25: R66.2@25.91,31.5 25.91,29.536 26.036,29.41 U10.2@26.036,28.14
NetR67_1: R67.1 U10.13 U10.14 | length 4.5
  Top Layer w0.25: R67.1@29.21,31.5 29.555,31.155 29.555,30.865 30.098,30.322 30.098,29.564 30.253,29.41 30.964,29.41 U10.13@30.964,28.14
NetR68_1: R68.1 U10.8 U10.9 | length 4.3
  Top Layer w0.25: R68.1@29.11,19.9 29.11,19.94 30.098,20.928 30.098,21.636 30.253,21.79 30.964,21.79 U10.9@30.964,23.06
NetR69_2: R69.2 U10.6 U10.7 | length 4.1
  Top Layer w0.25: U10.7@26.036,21.79 U10.6@26.036,23.06
  Top Layer w0.254: U10.7@26.036,21.79 26.747,21.79 26.9,21.638 26.9,21.514 26.925,21.489 26.925,20.405 27.39,19.94 R69.2@27.39,19.9
NetR70_2: R70.2 U13.81 | length 11.4
  Top Layer w0.25: R70.2@35.775,79.025 35.803,79.025 36.178,79.4 36.178,79.703 36.575,80.1 40.225,80.1 41.786,78.539 41.786,77.759 43.717,75.827 44.323,75.827 U13.81@44.35,75.8
NetR71_2: R71.2 U13.82 | length 6.7
  Top Layer w0.25: R71.2@39.2,79.025 39.25,79.025 42.975,75.3 U13.82@44.35,75.3
NetR72_2: R72.2 U13.83 | length 9.9
  Top Layer w0.25: R72.2@35.85,76.6 36.225,76.975 36.519,76.975 36.896,77.352 40.22,77.352 42.772,74.8 U13.83@44.35,74.8
NetR73_2: R73.2 U13.84 | length 6.1
  Top Layer w0.25: R73.2@39.25,76.6 39.625,76.225 40.814,76.225 42.739,74.3 U13.84@44.35,74.3
NetR74_2: R74.2 U13.85 | length 9.5
  Top Layer w0.25: R74.2@35.85,74.7 36.225,75.075 36.519,75.075 36.896,75.452 40.871,75.452 42.523,73.8 U13.85@44.35,73.8
NetR75_2: R75.2 U13.86 | length 5.7
  Top Layer w0.25: R75.2@39.25,74.7 41.09,74.7 42.49,73.3 U13.86@44.35,73.3
NetR76_2: R76.2 U13.87 | length 9.4
  Top Layer w0.25: R76.2@35.85,72.8 36.225,73.175 36.325,73.175 37.025,73.875 40.3,73.875 41.375,72.8 U13.87@44.35,72.8
NetR77_2: R77.2 U13.88 | length 5.3
  Top Layer w0.25: R77.2@39.25,72.8 39.3,72.8 39.8,72.3 U13.88@44.35,72.3
NetR78_2: R78.2 U13.55 | length 3.6
  Top Layer w0.25: U13.55@56.1,80.05 56.127,80.077 56.127,80.683 56.598,81.154 57.654,81.154 58.5,82 R78.2@58.5,82.05
NetR79_2: R79.2 U13.56 | length 2.5
  Top Layer w0.25: U13.56@55.6,80.05 55.627,80.077 55.627,80.827 56.8,82 R79.2@56.8,82.05
NetR81_2: R81.2 U13.59 | length 2.4
  Top Layer w0.25: U13.59@54.1,80.05 54.1,81.022 54.703,81.625 54.725,81.625 55.1,82 R81.2@55.1,82.05
NetR82_2: R82.2 U13.60 | length 2.1
  Top Layer w0.25: R82.2@53.4,82.05 53.6,81.85 U13.60@53.6,80.05
NetR83_2: R83.2 U13.61 | length 2.7
  Top Layer w0.25: R83.2@51.7,82.05 51.7,82 52.075,81.625 52.2,81.625 53.073,80.752 53.073,80.077 U13.61@53.1,80.05
NetR84_2: R84.2 U13.62 | length 3.8
  Top Layer w0.25: R84.2@50,82.05 50,82 51.101,80.899 52.357,80.899 52.573,80.683 52.573,80.077 U13.62@52.6,80.05
NetR90_2: R90.2 U4.15 | length 2.6
  Top Layer w0.25: R90.2@96.175,46.25 96.175,46.125 96.575,45.725 U4.15@98.45,45.725
NetR91_2: R91.2 U5.15 | length 4.4
  Top Layer w0.25: U5.15@125.835,53.86 129.265,53.86 129.575,53.55 129.825,53.55 R91.2@130.025,53.35
NetR96_2: R96.2 U6.15 | length 3.7
  Top Layer w0.25: U6.15@125.87,32.325 128.5,32.325 129.15,31.675 R96.2@129.15,31.55
NetR99_2: R99.2 U7.15 | length 5.3
  Top Layer w0.25: U7.15@146.535,54.51 147.384,54.51 148.144,53.75 150.5,53.75 151.15,53.1 R99.2@151.15,52.975
NetR100_1: R100.1 U19.22 | length 6.5
  Top Layer w0.25: R100.1@28.45,81.15 28.45,81.025 28.65,80.825 29.125,80.35 29.125,77.301 30.221,76.205 31.065,76.205 U19.22@31.07,76.2
NetR101_1: R101.1 U11.22 | length 2.1
  Top Layer w0.25: R101.1@-6.775,82.5 -6.65,82.5 -6.15,83 U11.22@-4.87,83
NRST: C77.2 S1.1 SWD.5 U13.14 | length 39
  Top Layer w0.25: SWD.5@40.695,90.425 42.65,88.47 S1.1@42.65,87.425 ; v1(52.55,66.825) 52.575,66.8 52.575,64.575 52.627,64.523 52.627,63.773 53.304,63.096 54.204,63.096 C77.2@55.4,61.9
  MidLayer2 w0.25: SWD.5@40.695,90.425 40.85,90.27 40.85,78.525 v1(52.55,66.825)
OA1: C125.1 IC1.14 R88.1 | length 5.4
  Top Layer w0.25: IC1.14@84.727,69.273 85.509,69.273 86.1,69.864 86.1,70.175 86.475,70.55 86.575,70.55 87.45,71.425 88.075,71.425 88.7,72.05 C125.1@88.75,72.05
OA2: C123.1 IC1.15 R86.1 | length 5.1
  Top Layer w0.25: IC1.15@84.727,69.773 85.379,69.773 85.675,70.069 85.675,71.779 85.725,71.829 85.725,71.925 86.1,72.3 R86.1@86.1,72.35 86.4,72.05 C123.1@87.55,72.05
OB1: C126.1 IC1.13 R89.1 | length 5.4
  Top Layer w0.25: IC1.13@84.727,68.773 86.423,68.773 R89.1@86.525,68.875 86.575,68.875 87.327,69.627 89.548,69.627 89.675,69.5 C126.1@89.725,69.5
OB2: C124.1 IC1.12 R87.1 | length 4.7
  Top Layer w0.25: IC1.12@84.727,68.273 85.452,68.273 86.1,67.625 86.1,67.575 86.85,66.825 87.025,66.825 88,65.85 88.175,65.85 C124.1@88.3,65.725
OB3: C120.1 IC1.11 R85.1 | length 4.3
  Top Layer w0.25: IC1.11@84.727,67.773 84.727,67.048 85.546,66.229 85.546,65.529 R85.1@85.625,65.45 85.9,65.725 C120.1@87.075,65.725
OUTA: IC1.16 IC1.19 JP35.1 | length 28.9
  Top Layer w0.25: v1(81.95,71.95) 81.95,71.831 82.5,71.281 IC1.19@82.5,70.5 ; IC1.16@84,70.5 84,71.281 84.45,71.731 v1(84.45,71.9) ; JP35.1@87.325,55.13 87.365,55.13 88.067,55.832 89.768,55.832 v1(90.5,55.1)
  MidLayer2 w0.25: v1(81.95,71.95) 81.975,71.925 84.425,71.925 v1(84.45,71.9) 87.475,68.875 87.475,58.125 v1(90.5,55.1)
OUTB: IC1.7 IC1.10 JP37.1 | length 26.1
  Top Layer w0.25: IC1.7@82.5,67.046 82.498,67.044 82.498,66.521 82.352,66.375 79.301,66.375 78.751,65.825 v1(78.475,65.825) 78.475,64.05 79.6,62.925 84.51,62.925 84.864,62.571 86.969,62.571 88.86,60.68 JP37.1@88.9,60.68 ; IC1.10@84,67.046 84.002,67.044 84.002,65.848 v1(84.125,65.725)
  MidLayer2 w0.25: v1(78.475,65.825) 78.581,65.825 79.356,66.6 83.25,66.6 v1(84.125,65.725)
PH0_OSC: C103.2 U13.12 Y1.1 | length 10.3
  Top Layer w0.25: C103.2@51.4,61.85 51.4,61.8 52.548,60.652 52.548,59.226 52.852,58.922 52.852,56.652 52,55.8 Y1.1@51.7,55.8 ; C103.2@51.6,61.6 U13.12@51.6,64.55
PH1_OSC: C104.2 U13.13 Y1.3 | length 9.3
  Top Layer w0.25: U13.13@52.1,64.55 52.1,63.1 C104.2@53.3,61.9 ; C104.2@53.3,61.85 53.3,61.8 54.052,61.048 55.908,61.048 56.152,60.804 56.152,58.652 Y1.3@55.7,58.2
REF: C105.1 C106.1 C107.1 C108.1 C111.1 HD2.11 JP29.2 U4.1 U5.1 U6.1 U7.1 U8.1 | length 173.7
  Top Layer w0.25: C105.1@98.575,42.8 98.95,42.425 98.95,42.225 104.9,36.275 108.35,36.275 109.95,37.875 109.95,55.275 HD2.11@107.2,58.025 ; C105.1@98.575,42.85 99.135,43.41 U4.1@99.135,44.54 ; JP29.2@101.95,57.425 106.408,57.425 107.008,58.025 HD2.11@107.2,58.025 ; 110,50.975 125.75,35.225 C107.1@125.75,35.175 125.75,35.125 125.375,34.75 125.331,34.75 125.185,34.604 U6.1@125.185,33.51 ; U5.1@125.15,55.045 125.15,56.1 125.725,56.675 C106.1@125.725,56.725 125.35,57.1 125.35,57.325 118.2,64.475 113.65,64.475 HD2.11@107.2,58.025 ; U8.1@144.14,32.985 144.14,33.263 144.145,33.268 144.994,33.268 145.9,34.174 145.9,34.9 146.725,35.725 C111.1@146.775,35.725 146.825,35.725 v1(148.475,37.375) ; U7.1@145.85,55.695 145.85,55.605 145.855,55.6 146.376,55.6 147.625,56.849 147.625,57.525 148.525,58.425 148.625,58.425 150.4,60.2 v1(150.4,60.35)
  MidLayer2 w0.25: HD2.11@107.2,58.025 115.667,58.025 116.528,57.163 147.213,57.163 147.913,57.863 ; v1(148.475,37.375) 148.475,37.651 147.913,38.213 147.913,57.863 ; v1(150.4,60.35) 147.913,57.863
REGREF: C112.2 C113.2 C127.1 C128.2 IC1.9 IC1.17 JP29.1 JP34.1 JP36.1 U18.6 | length 80.5
  Top Layer w0.25: IC1.9@83.5,67.046 83.498,67.044 83.498,66.352 82.975,65.829 C127.1@82.975,64.1 83.869,64.1 85.021,62.948 85.335,62.948 87.968,62.948 90.43,60.487 90.43,59.32 v1(90.575,59.175) 90.502,59.175 89.824,59.853 88.167,59.853 87.34,60.68 JP36.1@87.3,60.68 ; IC1.17@83.5,70.5 83.5,73.225 C128.2@83.8,73.525 83.825,73.5 v1(84.725,73.5) ; JP34.1@88.925,55.11 88.965,55.11 89.31,54.765 89.31,54.665 90.28,53.695 90.28,53.27 v1(90.475,53.075) ; C112.2@97.595,59.12 97.595,59.17 C113.2@99.529,59.17 ; U18.6@99.115,61.611 99.115,59.584 C113.2@99.529,59.17 ; v1(103.675,59.125) JP29.1@101.95,59.125 101.905,59.17 C113.2@99.55,59.17 C113.2@99.529,59.17
  MidLayer2 w0.25: v1(84.725,73.5) 90.625,67.6 v1@90.625,59.225 ; v1(90.475,53.075) 91.467,52.083 98.633,52.083 103.675,57.125 v1(103.675,59.125) 103.399,59.125 103.374,59.15 90.7,59.15 v1@90.625,59.225 ; v1(90.575,59.175) v1@90.625,59.225
SDO1: R90.1 U5.14 | length 43.7
  Top Layer w0.25: v1(94.225,47.55) 94.375,47.4 94.375,46.75 94.75,46.375 R90.1@94.75,46.25 ; U5.14@125.835,53.36 127.364,53.36 127.874,52.85 v1(128.15,52.85)
  Bottom Layer w0.25: v1(94.225,47.55) 94.1,47.425 94.1,45.45 94.575,44.975 101.375,44.975 105.65,49.25 121.875,49.25 125.525,52.9 128.1,52.9 v1(128.15,52.85)
SDO2: R91.1 U6.14 | length 23.9
  Top Layer w0.25: U6.14@125.87,31.825 127.4,31.825 v1(127.8,31.425) ; R91.1@130.025,51.9 130.15,51.9 130.35,51.7 v1(130.35,50.45)
  Bottom Layer w0.25: v1(127.8,31.425) 127.8,31.556 128.775,32.531 128.775,47.05 130.475,48.75 130.475,50.325 v1(130.35,50.45)
SDO3: R96.1 U7.14 | length 36.9
  Top Layer w0.25: v1(129.9,30.1) 130.6,30.8 R96.1@130.6,31.55 ; U7.14@146.535,54.01 147.35,54.01 148.315,53.045 149.13,53.045 v1(149.325,52.85)
  Bottom Layer w0.25: v1(129.9,30.1) 129.9,30.376 130.275,30.751 130.275,35.7 131.418,36.843 132.568,36.843 148.38,52.655 149.13,52.655 v1(149.325,52.85)
SDO4: R99.1 U8.14 | length 28.3
  Top Layer w0.25: U8.14@144.825,31.3 144.83,31.295 145.49,31.295 146.41,30.375 147.124,30.375 147.399,30.1 v1(147.675,30.1) ; R99.1@152.6,52.975 152.638,52.937 152.638,50.938 v1(152.675,50.9)
  Bottom Layer w0.25: v1(147.675,30.1) 147.675,30.354 152.675,35.354 v1(152.675,50.9)
SDO5: U8.15 | length 4.8
  Top Layer w0.25: U8.15@144.825,31.8 145.519,31.8 146.294,31.025 148.424,31.025 148.874,30.575 v1(149.15,30.575)
SELA0: IC1.2 U13.39 | length 22.9
  Top Layer w0.25: U13.39@59.85,72.8 70.875,72.8 74.402,69.273 IC1.2@81.273,69.273
SELA1: IC1.1 U13.40 | length 22.9
  Top Layer w0.25: U13.40@59.85,73.3 71.1,73.3 74.627,69.773 IC1.1@81.273,69.773
SELB0: IC1.4 U13.38 | length 23.1
  Top Layer w0.25: U13.38@59.85,72.3 68.644,72.3 72.671,68.273 IC1.4@81.273,68.273
SELB1: IC1.5 U13.37 | length 23.1
  Top Layer w0.25: U13.37@59.85,71.8 68.611,71.8 72.638,67.773 IC1.5@81.273,67.773
SPI2_MISO: JP30.1 R27.1 U13.53 U14.21 | length 69.8
  Top Layer w0.25: v1(51.925,49.95) 51.975,49.9 JP30.1@51.975,48.13 ; v1(53.625,31.05) 54.675,30 R27.1@55.375,30 55.375,28.543 57.127,26.792 57.127,24.958 56.803,24.635 56.185,24.635 U14.21@56.175,24.625 ; v1(56.7,78.25) 56.7,78.526 57.1,78.926 U13.53@57.1,80.05
  Bottom Layer w0.25: v1(53.625,31.05) 53,31.675 53,38.35 54.2,39.55 54.2,48.1 52.545,49.755 52.12,49.755 v1(51.925,49.95) 50.2,51.675 50.2,64.478 48.725,65.953 48.725,75.675 50.3,77.25 55.596,77.25 56.596,78.25 v1(56.7,78.25)
SPI2_MOSI: U13.54 U14.20 U15.20 | length 74
  Top Layer w0.25: v1(51.6,41.5) 51.876,41.5 52.276,41.1 U15.20@54.992,41.1 ; v1(52.625,28.275) 52.789,28.111 52.789,27.511 55.165,25.135 56.165,25.135 U14.20@56.175,25.125 ; v1(55.025,78.475) 55.22,78.67 55.845,78.67 56.573,79.398 56.573,80.023 U13.54@56.6,80.05
  Bottom Layer w0.25: v1(51.6,41.5) 51.525,41.425 47.5,41.425 ; v1(52.625,28.275) 52.625,28.4 47.5,33.525 47.5,41.425 ; v1(55.025,78.475) 54.83,78.28 54.423,78.28 54.369,78.225 49.575,78.225 47.5,76.15 47.5,66.579 47.512,66.567 47.512,65.833 47.5,65.821 47.5,41.425
SPI2_NSS: U13.51
SPI2_SCK: U13.52 U14.22 U15.22 | length 65.1
  Top Layer w0.25: U15.22@54.992,40.1 U15.22@55.555,40.1 ; U14.22@56.175,24.125 56.165,24.135 55.09,24.135 51.4,27.825 51.4,36.675 53.35,38.625 55.635,38.625 55.944,38.933 55.944,39.767 55.708,40.002 55.653,40.002 U15.22@55.555,40.1 ; v1(56.9,40.1) U15.22@55.555,40.1 ; v1(57.325,76.675) 57.325,76.951 57.6,77.226 U13.52@57.6,80.05
  Bottom Layer w0.25: v1(56.9,40.1) 56.9,63.404 58.487,64.991 58.487,75.513 v1(57.325,76.675)
SWCLK: SWD.3 U13.76 | length 12.8
  Top Layer w0.254: SWD.3@43.235,90.425 43.235,90.262 43.9,89.597 43.9,78.325 43.925,78.3 U13.76@44.35,78.3
SWDIO: SWD.2 U13.72 | length 13.7
  Top Layer w0.25: SWD.2@45.775,92.965 47.6,91.14 U13.72@47.6,80.05
SWO: SWD.4 U13.89 | length 22.7
  Top Layer w0.254: SWD.4@43.235,92.965 44.346,91.854 44.346,81.395 45.25,80.491 45.25,72.075 45,71.825 44.375,71.825 U13.89@44.35,71.8
USB_5V: C129.2 CR1.5 HD0.1 J1.A4_B9 J1.B4_A9 LED5.2 | length 115.2
  Top Layer w0.25: J1.A4_B9@32.2,89.25 32.113,89.337 32.113,90.559 32.676,91.122 35.703,91.122 LED5.2@35.95,90.875 36.325,91.25 36.325,91.75 CR1.5@37,92.425 ; HD0.1@35.575,70.725 27.891,63.041 27.891,52.266 22.15,46.525 18.7,46.525 13.25,51.975 13.25,86.146 18.804,91.7 26.725,91.7 27.487,90.938 27.487,89.337 J1.B4_A9@27.4,89.25 27.575,89.425 27.575,89.851 30.572,92.848 34.411,92.848 34.938,93.376 36.469,93.376 37,92.844 CR1.5@37,92.635 CR1.5@37,92.425 ; C129.2@37.65,90.875 37.65,91.8 37.179,92.271 37.154,92.271 CR1.5@37,92.425
USB_DM_CONN: CR1.6 J1.A7 J1.B7 | length 19.3
  Top Layer w0.25: J1.A7@29.55,89.25 29.575,89.225 29.575,88.649 29.796,88.428 30.05,88.428 ; J1.B7@30.55,89.25 30.525,89.225 30.525,88.649 30.304,88.428 30.05,88.428 ; CR1.6@37.95,92.635 38.104,92.48 38.104,92.196 38.525,91.775 38.525,88.075 35.5,85.05 31.696,85.05 30.05,86.696 30.05,88.428
USB_DM_MCU: R97.1 U13.70 | length 16
  Top Layer w0.25: R97.1@47.85,95.425 47.85,95.3 48.05,95.1 48.125,95.1 48.875,94.35 48.875,80.975 48.627,80.727 48.627,80.077 U13.70@48.6,80.05
USB_DP_CONN: CR1.4 J1.A6 J1.B6 | length 10.4
  Top Layer w0.25: J1.B6@29.05,89.25 29.075,89.275 29.075,89.851 30.012,90.788 ; J1.A6@30.05,89.25 30.05,90.75 30.012,90.788 ; CR1.4@36.05,92.635 36.05,92.425 35.896,92.271 31.494,92.271 30.012,90.788
USB_DP_MCU: R98.1 U13.71 | length 12.5
  Top Layer w0.25: R98.1@48.075,92.55 48.1,92.525 U13.71@48.1,80.05
VU: C1.1 C4.1 JP0.2 U1.3 U2.3 | length 55.4
  Top Layer w1: U2.3@104.275,83.075 104.275,82.863 104.3,82.838 109.862,82.838 C4.1@110.1,82.6 ; C4.1@110.6,82.6 111.1,82.1 111.1,81.675 119.8,72.975 134.4,72.975 136.375,74.95 136.375,76.575 137.6,77.8 137.725,77.8 138.075,78.15 C1.1@138.075,78.275 ; U1.3@132.49,83.075 132.49,82.7 132.515,82.675 135.15,82.675 137.814,80.011 137.814,78.8 138.314,78.3 C1.1@138.725,78.3 139.225,77.8 139.875,77.8 142.204,75.471 142.604,75.471 JP0.2@142.7,75.375
pads on no net: B0.20 B0.69 B0.70 HD0.19 HD0.22 HD0.a HD0.b HD1.1 HD1.2 HD1.3 HD1.4 HD1.a HD1.b HD2.1 HD2.2 HD2.3 HD2.5 HD2.6 HD2.8 HD2.a HD2.b HD3.a HD3.b J1. J1.A8 J1.B8 R2.1 R4.1 S1.2 S1.3 U12.4 U13.5 U13.7 U13.8 U13.9 U13.15 U13.16 U13.17 U13.18 U13.22 U13.29 U13.30 U13.31 U13.32 U13.33 U13.34 U13.35 U13.36 U13.43 U13.45 U13.46 U13.57 U13.58 U13.63 U13.64 U13.65 U13.66 U13.68 U13.69 U13.77 U13.78 U13.79 U13.80 U13.90 U13.91 U13.92 U13.93 U13.95 U13.96 U14.18 U14.24 U14.26 U15.18 U15.24 U15.26 U18.1 U18.3 U18.5 U18.7 U18.8

## Polygon pours and split planes (outlines as drawn)
DVDD_3V on MidLayer2 "Mid2DVDD_3V" (solid, remove dead copper, pour order 33): 39.325,14.1 39.325,46.9 39.325,52.6 59.075,52.6 65.9,59.425 65.9,84.8 72.8,84.8 72.8,97.6 -19.3,97.6 -19.3,14.1
AVDD3 on MidLayer2 "Mid2AVDD3" (solid, remove dead copper, pour order 34): 42.225,43.925 42.225,14.1 156.4,14.1 156.4,97.6 143.075,97.6 77.475,97.6 77.475,82.975 67.6,82.975 67.6,57.35 60.4,50.15 42.225,50.15
AVDD on MidLayer3 "Mid3AVDD" (solid, remove dead copper, pour order 38): 42.225,43.925 42.225,14.1 156.4,14.1 156.4,97.6 143.075,97.6 77.475,97.6 77.475,82.975 67.6,82.975 67.6,57.35 60.4,50.15 42.225,50.15
DVDD on MidLayer3 "Mid3DVDD" (solid, remove dead copper, pour order 40): 39.325,14.1 39.325,46.9 39.325,52.6 59.075,52.6 65.9,59.425 65.9,84.8 72.8,84.8 72.8,97.6 -19.3,97.6 -19.3,14.1
AGND on MidLayer1 "AGND_L02_P042" (solid, remove dead copper, pour order 42): -19.3,14.1 156.4,14.1 156.4,97.6 -19.3,97.6
AGND on MidLayer4 "AGND_L05_P041" (solid, remove dead copper, pour order 41): -19.3,14.1 156.4,14.1 156.4,97.6 -19.3,97.6
AGND on Top Layer "AGND_L01_P045" (solid, remove dead copper, pour order 45): -19.3,14.1 156.4,14.1 156.4,97.6 -19.3,97.6
AGND on Bottom Layer "AGND_L06_P046" (solid, remove dead copper, pour order 46): -19.3,14.1 156.4,14.1 156.4,97.6 -19.3,97.6

## Keep-outs
Keep-Out Layer:
  lines w0.254: -19,14.313 -19,97.2 156.224,97.2 156.176,14.29 -19,14.313

## Silkscreen, mask and mechanical layers (free items; w line width, h text height)
Top Overlay:
  lines w0.2: -18.33,23.91 -18.33,87.79 -8.02,87.79 -8.02,23.91 -18.33,23.91
  text "1" at -7.675,77.7 h1.5 r270
  text "MthBrd_3.0" at 138.225,68.875 h1.5
  text "260419 SK" at 138.225,66.375 h1.5
  text "NI_0" at -9.1,62.1 h2.54 r270